# Allegro board QUADCOPTER1brd3.brd
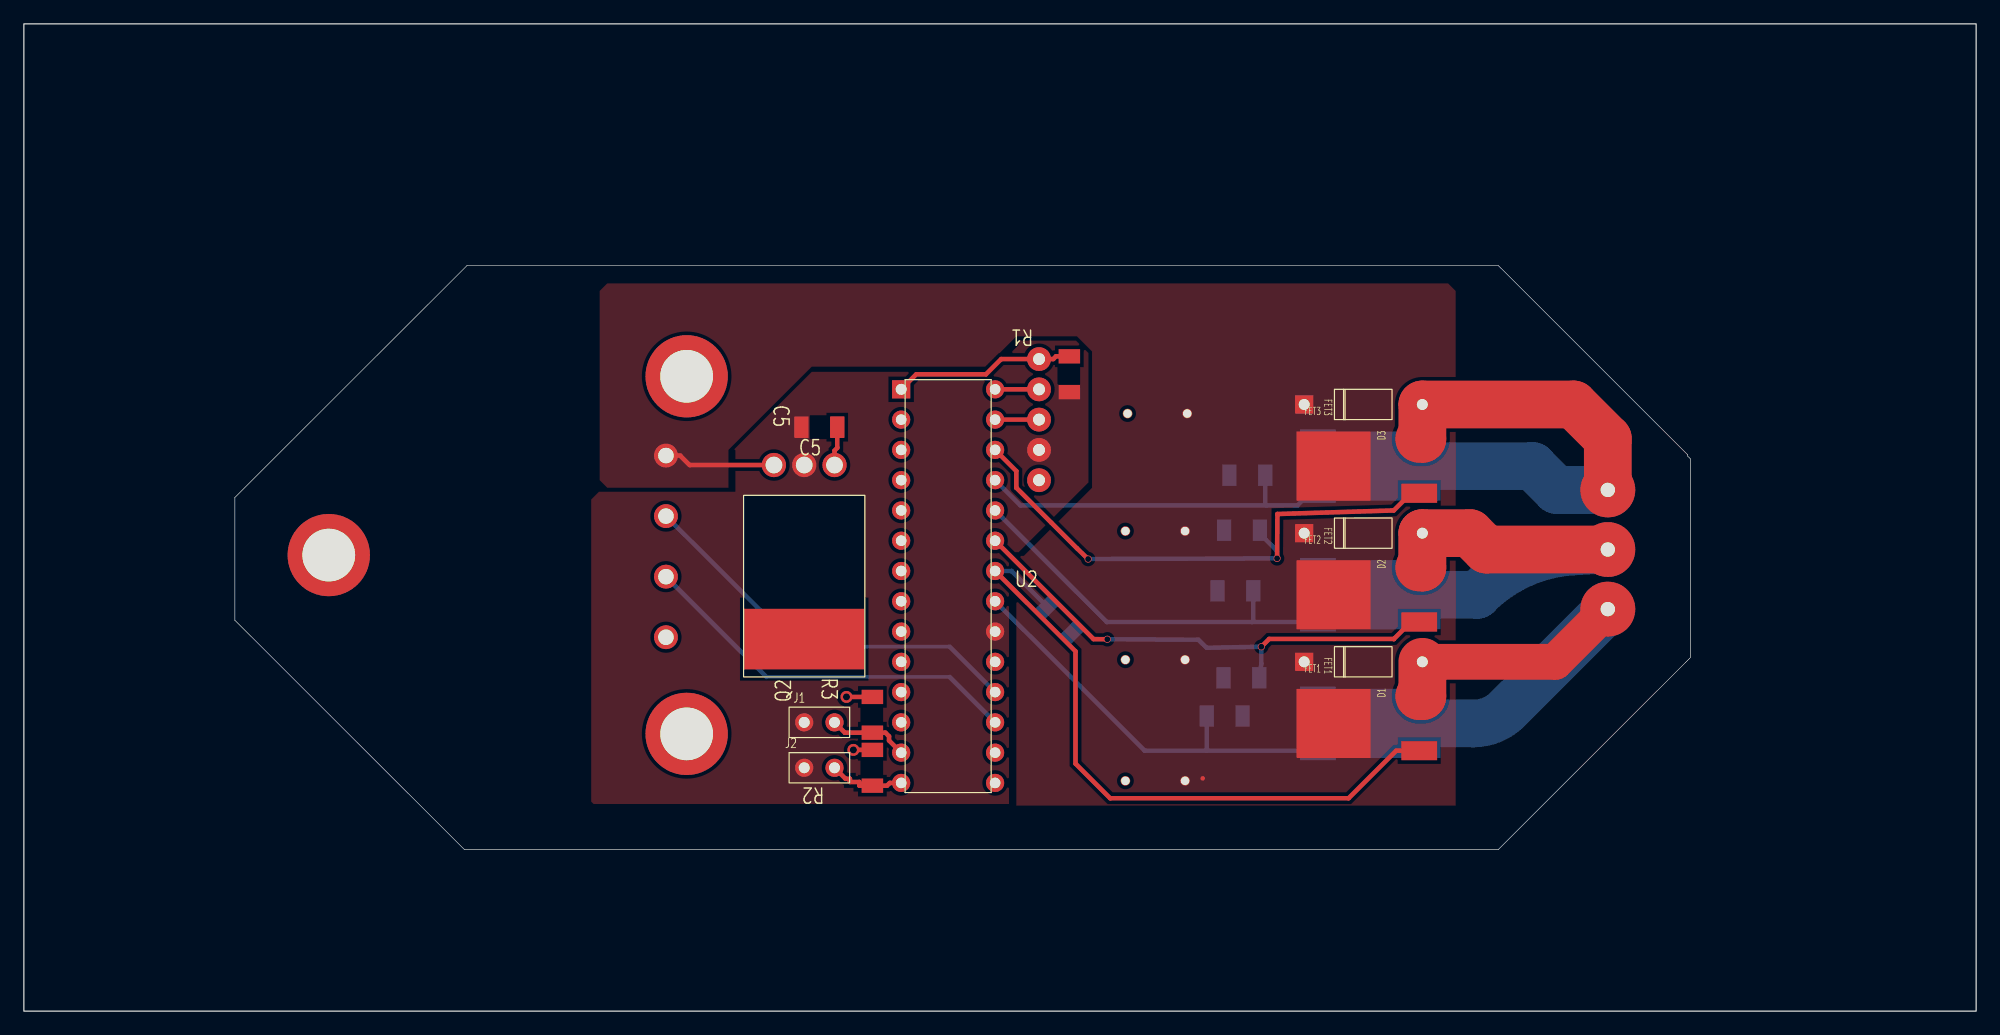
[diagram p0: board, top side]
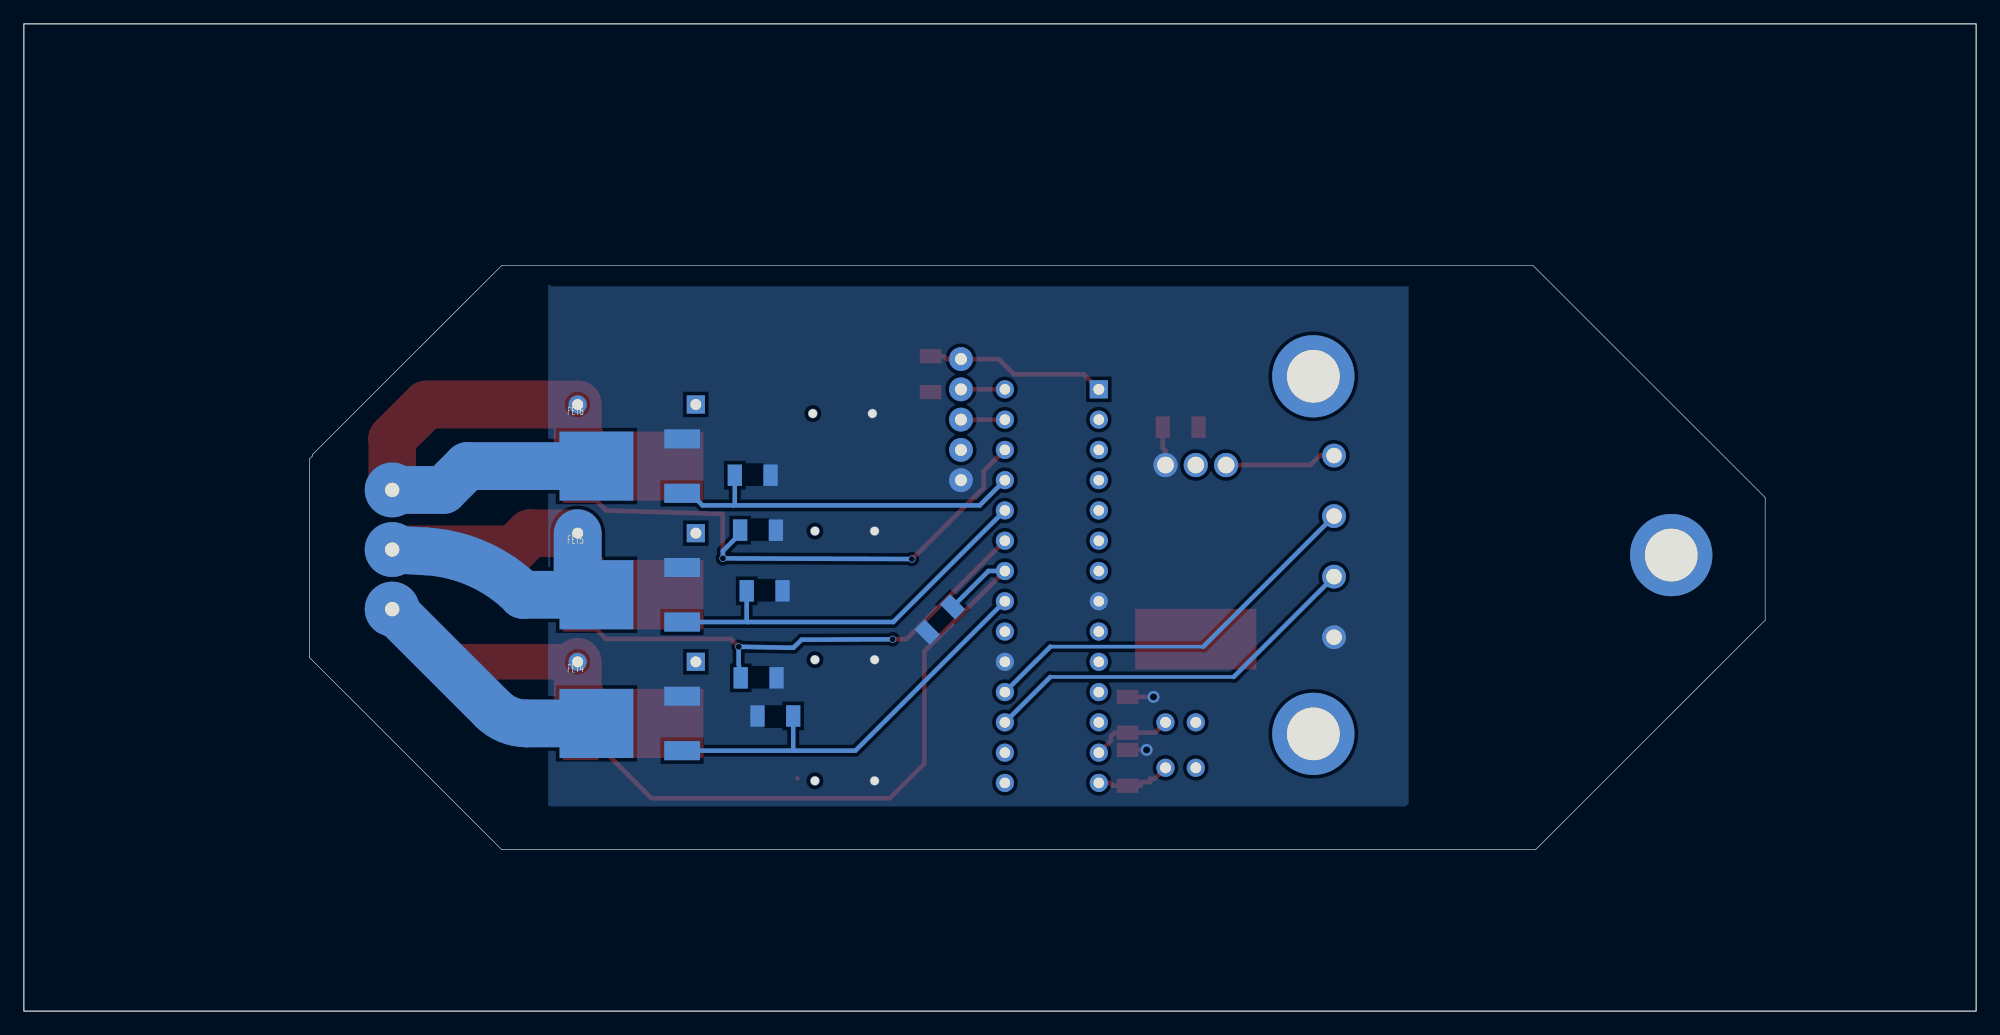
[diagram p1: board, bottom side, seen from below]

Outline 163.65 x 82.83 mm; copper layers: TOP, BOTTOM. Coordinates in mm from the lower left corner of the outline.
Outline path: rectangle 0,0 163.65,82.83 ; 17.69,43.1 17.69,32.8 36.94,13.54 123.58,13.54 139.7,29.66 139.7,46.34 139.48,46.57 139.48,46.68 123.58,62.57 37.16,62.57 17.69,43.1

## Placement (name value [footprint] x y rotation side)
C5  4.7uF  [SMD_CAP_1206]  66.69 48.99 0 top
C6  100uF  [CAP250]  100.34 22.32 180 top
C7  100uF  [CAP250]  100.34 32.48 180 top
C8  100uF  [CAP250]  100.34 43.28 180 top
C9  100uF  [CAP250]  100.52 53.14 180 top
D1  ga6  [DO41]  107.32 29.31 270 top
D2  ga6  [DO41]  107.32 40.1 270 top
D3  ga6  [DO41]  107.32 50.9 270 top
FET1  ON NTD5867  [NTD5867]  106.69 21.05 0 top
FET2  ON NTD5867  [NTD5867]  106.69 31.85 0 top
FET3  ON NTD5867  [NTD5867]  106.69 42.64 0 top
FET4  ON NTD5867  [NTD5867]  118.75 21.05 180 bottom
FET5  ON NTD5867  [NTD5867]  118.75 31.85 180 bottom
FET6  ON NTD5867  [NTD5867]  118.75 42.64 180 bottom
J1  JUMPER  [JUMPER2]  65.42 24.23 0 top
J2  JUMPER  [JUMPER2]  65.42 20.42 0 top
J3  CON5  [CONN5]  83.83 43.28 0 top
J4  To Motor  [ED1362]  135.28 31.23 90 top
J5  To Microcontroller  [KDCONN4]  43.83 56.61 270 top
NOREF  -  [unnamed]  55.56 53.26 0 top
NOREF#2  -  [unnamed]  25.56 38.26 0 top
NOREF#3  -  [unnamed]  55.56 23.26 0 top
Q2  Diodes_AP1117T50L-U  [TO220-3]  67.95 45.82 90 top
R1  10k  [SMD_RES_1206]  87.64 53.44 270 top
R2  10k  [SMD_RES_1206]  71.13 20.42 270 top
R3  10k  [SMD_RES_1206]  71.13 24.86 270 top
R4  1k  [SMD_RES_1206]  86.86 32.86 135 bottom
R5  1k  [SMD_RES_1206]  100.66 24.76 180 bottom
R6  1k  [SMD_RES_1206]  102.06 27.96 0 bottom
R7  1k  [SMD_RES_1206]  101.56 35.26 0 bottom
R8  1k  [SMD_RES_1206]  102.11 40.35 0 bottom
R9  1k  [SMD_RES_1206]  102.56 44.96 0 bottom
U2  -  [PIC16F916]  77.48 35.66 0 top

## Library data of the parts
C5-C9 = CAP
D1-D3 = ga6
FET1-FET6 = ON NTD5867
J1 J2 = JUMPER: User Part Number: ***
J3 = CON5
J4 = CON3
J5 = 4 HEADER
Q2 = Diodes_AP1117T50L-U_1
R1-R9 = R
U2 = PIC16F916_2

## Footprints (pads in the part's own frame, mm; a bottom-side part is the same pattern mirrored in y, then rotated)
CAP250
  round 0.8 hole 0.7: 1(3,3) 2(8,3)
CONN5
  round 2 hole 1: 1(1.27,11.43) 2(1.27,8.89) 3(1.27,6.35) 4(1.27,3.81) 5(1.27,1.27)
DO41
  rect 1.524x1.524 hole 0.914: 1(0,0)
  round 1.524 hole 0.914: 2(0,9.906)
ED1362
  round 4.6 hole 1.2: 1(2.5,2.5) 2(7.5,2.5) 3(12.5,2.5)
JUMPER2
  round 1.524 hole 0.914: 1(0,0) 2(2.54,0)
KDCONN4
  round 2 hole 1.3: 1(10,10) 2(15.08,10) 3(20.16,10) 4(25.24,10)
NTD5867
  rect 3x1.6 smd: 1(10.28,0.8) 3(10.28,5.372)
  rect 6.2x5.8 smd: 2(3.1,3.086)
PIC16F916
  rect 1.524x1.524 hole 0.914: 1(-3.937,16.51)
  round 1.524 hole 0.889: 2(-3.937,13.97) 3(-3.937,11.43) 4(-3.937,8.89) 5(-3.937,6.35) 6(-3.937,3.81) 7(-3.937,1.27) 8(-3.937,-1.27) 9(-3.937,-3.81) 10(-3.937,-6.35) 11(-3.937,-8.89) 12(-3.937,-11.43) 13(-3.937,-13.97) 14(-3.937,-16.51) 15(3.937,-16.51) 16(3.937,-13.97) 17(3.937,-11.43) 18(3.937,-8.89) 19(3.937,-6.35) 20(3.937,-3.81) 21(3.937,-1.27) 22(3.937,1.27) 23(3.937,3.81) 24(3.937,6.35) 25(3.937,8.89) 26(3.937,11.43) 27(3.937,13.97) 28(3.937,16.51)
SMD_CAP_1206
  rect 1.2x1.8 smd: 1(-1.5,0) 2(1.5,0)
SMD_RES_1206
  rect 1.2x1.8 smd: 1(-1.5,0) 2(1.5,0)
TO220-3
  rect 5.08x10.16 smd: (-14.605,2.54)
  round 2.032 hole 1.397: 1(0,0) 2(0,2.54) 3(0,5.08)
unnamed
  round 6.9 hole 4.42: (0,0)

## Nets
12V: C6.1 C7.1 C8.1 C9.1 D1.1(K) D2.1(K) D3.1(K) FET1.2(D) FET2.2(D) FET3.2(D) J5.1 Q2.3(VIN)
GND: C5.2 C6.2 C7.2 C8.2 C9.2 FET4.3(S) FET5.3(S) FET6.3(S) J3.5 J5.4 Q2.1(GND) R2.1 R3.1 R4.1 R5.1 R6.1 R7.1 R8.1 R9.1 U2.8(VSS#8) U2.19(VSS#19)
A: D1.2(A) FET1.3(S) FET4.2(D) J4.1
ADDR0: J1.2 R3.2 U2.13(RC2)
ADDR1: J2.2 R2.2 U2.14(RC3)
AHIGH: FET1.1(G) R4.2 U2.22(RB1)
ALOW: FET4.1(G) R5.2 U2.21(RB0)
B: D2.2(A) FET2.3(S) FET5.2(D) J4.2
BHIGH: FET2.1(G) R6.2 U2.23(RB2)
BLOW: FET5.1(G) R7.2 U2.24(RB3)
C: D3.2(A) FET3.3(S) FET6.2(D) J4.3
CHIGH: FET3.1(G) R8.2 U2.26(RB5)
CLOW: FET6.1(G) R9.2 U2.25(RB4)
ICPSCLK: J3.3 U2.27(ICSPCLK)
ICPSDAT: J3.2
ICSPDAT: U2.28(ICSPDAT)
NMCLR: J3.1 R1.1 U2.1($0)
SCL: J5.3 U2.17(SCL)
SDA: J5.2 U2.18(SDA)
VEXT: C5.1 J1.1 J2.1 J3.4 Q2.2(VOUT) R1.2 U2.20(VDD)

Pads without a net: U2 2 3 4 5 6 7 9 10 11 12 15 16

## Via types
v1: diameter 0.6, hole 0.5, TOP to BOTTOM, 4 vias
v2: diameter 1, hole 0.6, TOP to BOTTOM, 2 vias

## Routing (per net, layer and track width the routed paths; a pad name or vN(x,y) marks a point on that pad's centre or on a via; arc(x,y) is an arc through that point)
12V: length 9.4
  TOP w0.381: Q2.3 55.81,45.82 55.02,46.61 J5.1
GND: length 7
  TOP w0.381: C5.2 68.19,47.26 67.95,47.03 Q2.1 ; R2.1 v2(69.54,21.92) ; R3.1 v2(68.96,26.36)
A: length 41.4
  TOP w3: D1.2 128.36,29.31 J4.1
  TOP w4: D1.2 117.23,26.43 FET1.3
  BOTTOM w4: J4.1 124.36,25.31 arc(123.06,24.44) 121.53,24.14 FET4.2
ADDR0: length 6.8
  TOP w0.381: U2.13 72.53,22.71 72.53,23.06 72.22,23.36 R3.2 68.82,23.36 J1.2
ADDR1: length 6.6
  TOP w0.381: U2.14 72.59,19.15 72.36,18.92 R2.2 70.04,18.92 70.04,19.23 69.24,19.23 69.24,19.49 68.88,19.49 J2.2
AHIGH: length 56.2
  TOP w0.381: U2.22 88.16,30.19 88.16,20.76 91.06,17.86 111.05,17.86 115.04,21.85 FET1.1
  BOTTOM w0.381: R4.2 82.8,36.93 U2.22
ALOW: length 35.2
  BOTTOM w0.381: R5.2 99.16,21.85 ; 99.16,21.85 FET4.1 ; 99.16,21.85 93.95,21.85 U2.21
B: length 42.5
  TOP w4: J4.2 122.59,38.73 121.22,40.1 D2.2 117.23,37.22 FET2.3
  BOTTOM w4: 117.23,34.94 121.82,34.94 arc(125.56,37.51) 129.97,38.58 J4.2 ; 117.23,34.94 115.66,34.94 ; 117.23,34.94 D2.2
BHIGH: length 42.7
  TOP w0.381: v1(103.73,30.57) 104.39,31.23 114.85,31.23 ; 114.85,31.23 116.27,32.65 FET2.1 ; 114.85,31.23 114.84,31.21 ; U2.23 89.67,31.21 v1(90.82,31.2)
  BOTTOM w0.381: v1(90.82,31.2) 98.45,31.16 99.15,30.49 v1(103.73,30.57) 103.73,29.14 R6.2
BLOW: length 33.6
  BOTTOM w0.381: 102.96,32.65 103.06,32.75 R7.2 ; 102.96,32.65 90.78,32.65 U2.24 ; 102.96,32.65 FET5.1
C: length 42.1
  TOP w4: J4.3 132.78,48.03 129.91,50.9 D3.2 117.23,48.02 FET3.3
  BOTTOM w4: FET6.2 126.48,45.73 128.48,43.73 J4.3
CHIGH: length 47.4
  TOP w0.381: U2.26 83.19,45.31 83.2,43.91 88.28,38.83 v1(89.22,37.93) ; FET3.1 116.27,43.44 114.84,42.01 105.08,41.71 v1(105.05,37.99)
  BOTTOM w0.381: v1(89.22,37.93) v1(105.05,37.99) 105.05,38.61 103.61,40.05 R8.2
CLOW: length 30.9
  BOTTOM w0.381: R9.2 104.06,42.53 104.16,42.43 ; 104.16,42.43 106.76,42.43 107.78,43.44 FET6.1 ; 104.16,42.43 83.54,42.43 U2.25
ICPSCLK: length 3.7
  TOP w0.381: J3.3 U2.27
ICSPDAT: length 3.7
  TOP w0.381: U2.28 81.42,52.17 81.96,52.17 85.1,52.17
NMCLR: length 15.2
  TOP w0.381: R1.1 86.52,54.94 86.29,54.71 J3.1 81.92,54.71 80.64,53.43 74.8,53.43 U2.1
SCL: length 32.7
  BOTTOM w0.3: 62.24,28.04 77.61,28.04
  BOTTOM w0.381: J5.3 62.24,28.04 ; 77.61,28.04 U2.17
SDA: length 33.7
  BOTTOM w0.3: 77.61,30.58 64.78,30.58
  BOTTOM w0.381: U2.18 77.61,30.58 ; 64.78,30.58 J5.2

## Copper pours and planes (outline as drawn; the poured copper is in the pictures)
12V on TOP: 66.05,54.07 80.66,54.07 83.2,56.61 88.28,56.61 89.55,55.34 89.55,43.91 83.83,38.2 83.2,38.2 83.2,17.24 120.03,17.24 120.03,60.42 119.39,61.06 48.91,61.06 48.27,60.42 48.27,44.55 48.91,43.91 59.06,43.91 59.06,47.09
GND on BOTTOM: 47.57,60.81 119.44,60.81 119.71,61.08 119.71,17.3 119.57,17.17 47.83,17.17 47.57,17.43
VEXT on TOP: 48.21,43.58 59.65,43.58 59.65,47.05 59.52,47.17 65.98,53.64 81.14,53.64 83.37,55.86 83.37,56.19 83.43,56.26 88.2,56.26 89.31,55.15 89.31,44.43 82.97,38.09 82.58,38.09 82.58,17.38 47.75,17.38 47.56,17.58 47.56,42.93
